# EAGLE board hacksaw_panelized_r0 (EAGLE 7.3.0)
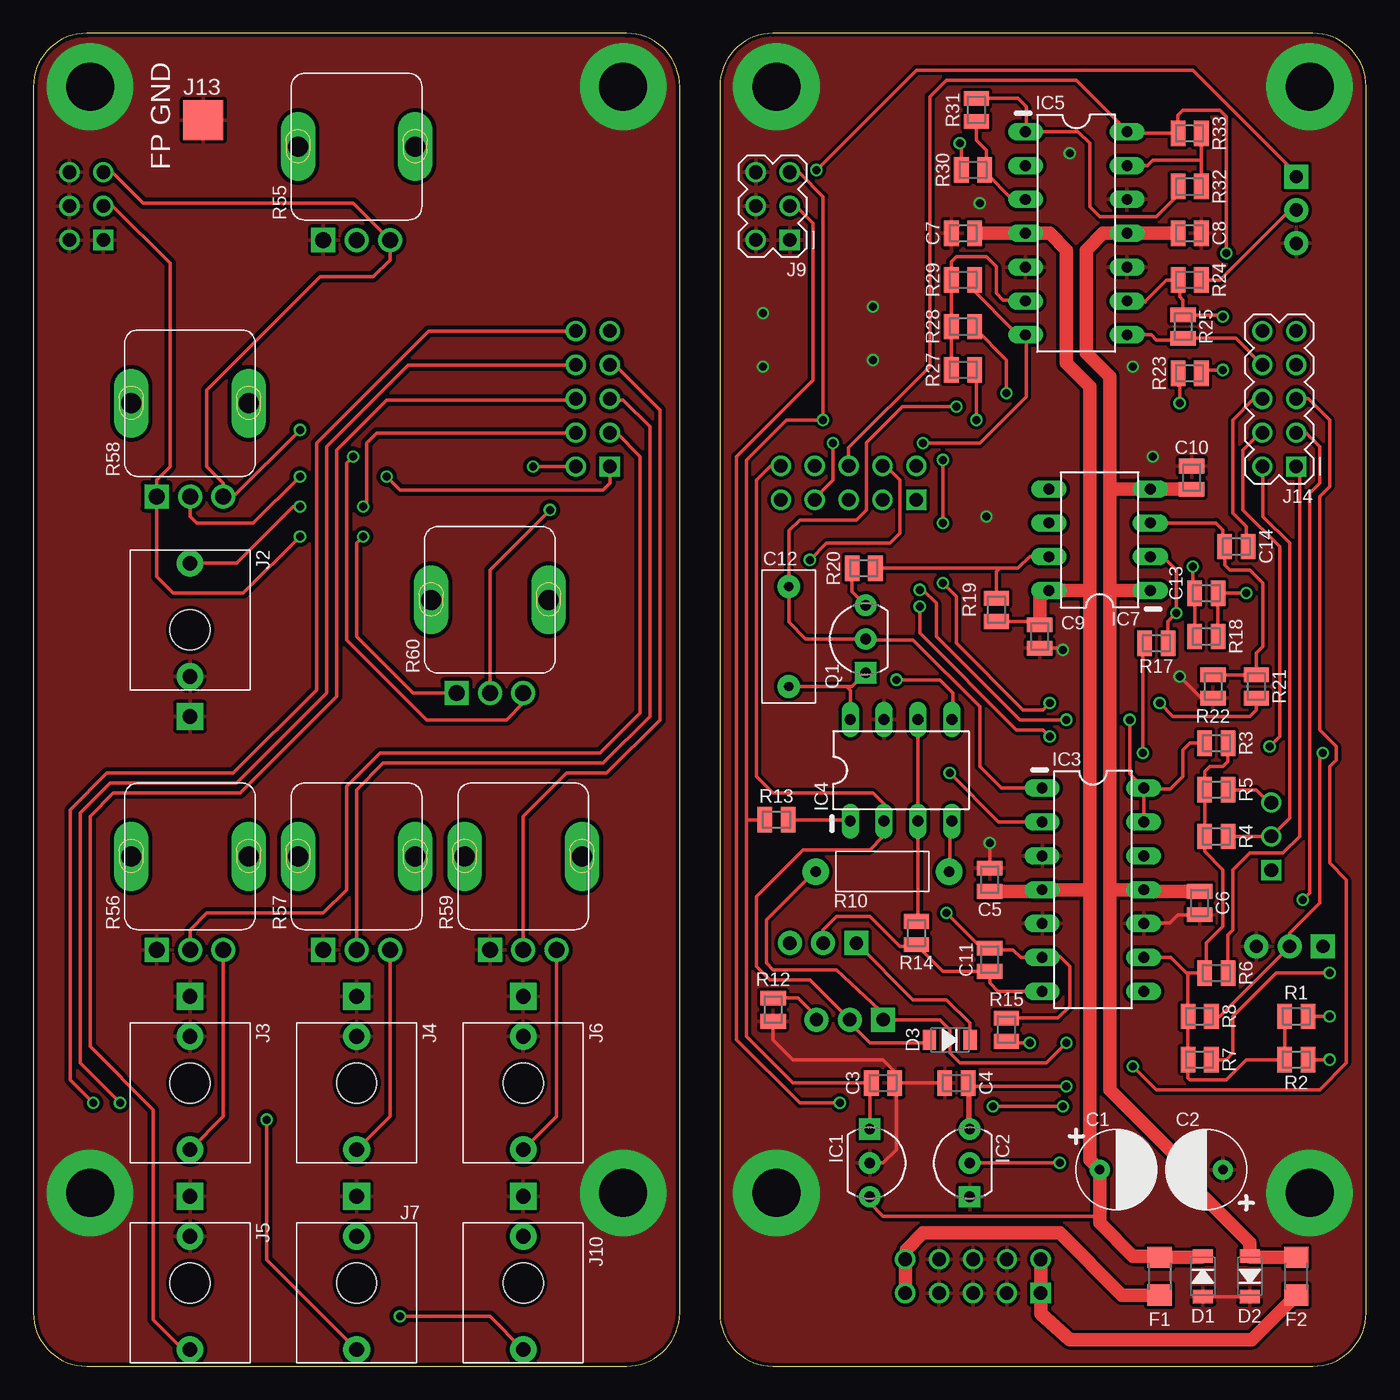
[diagram p0: board, top side]
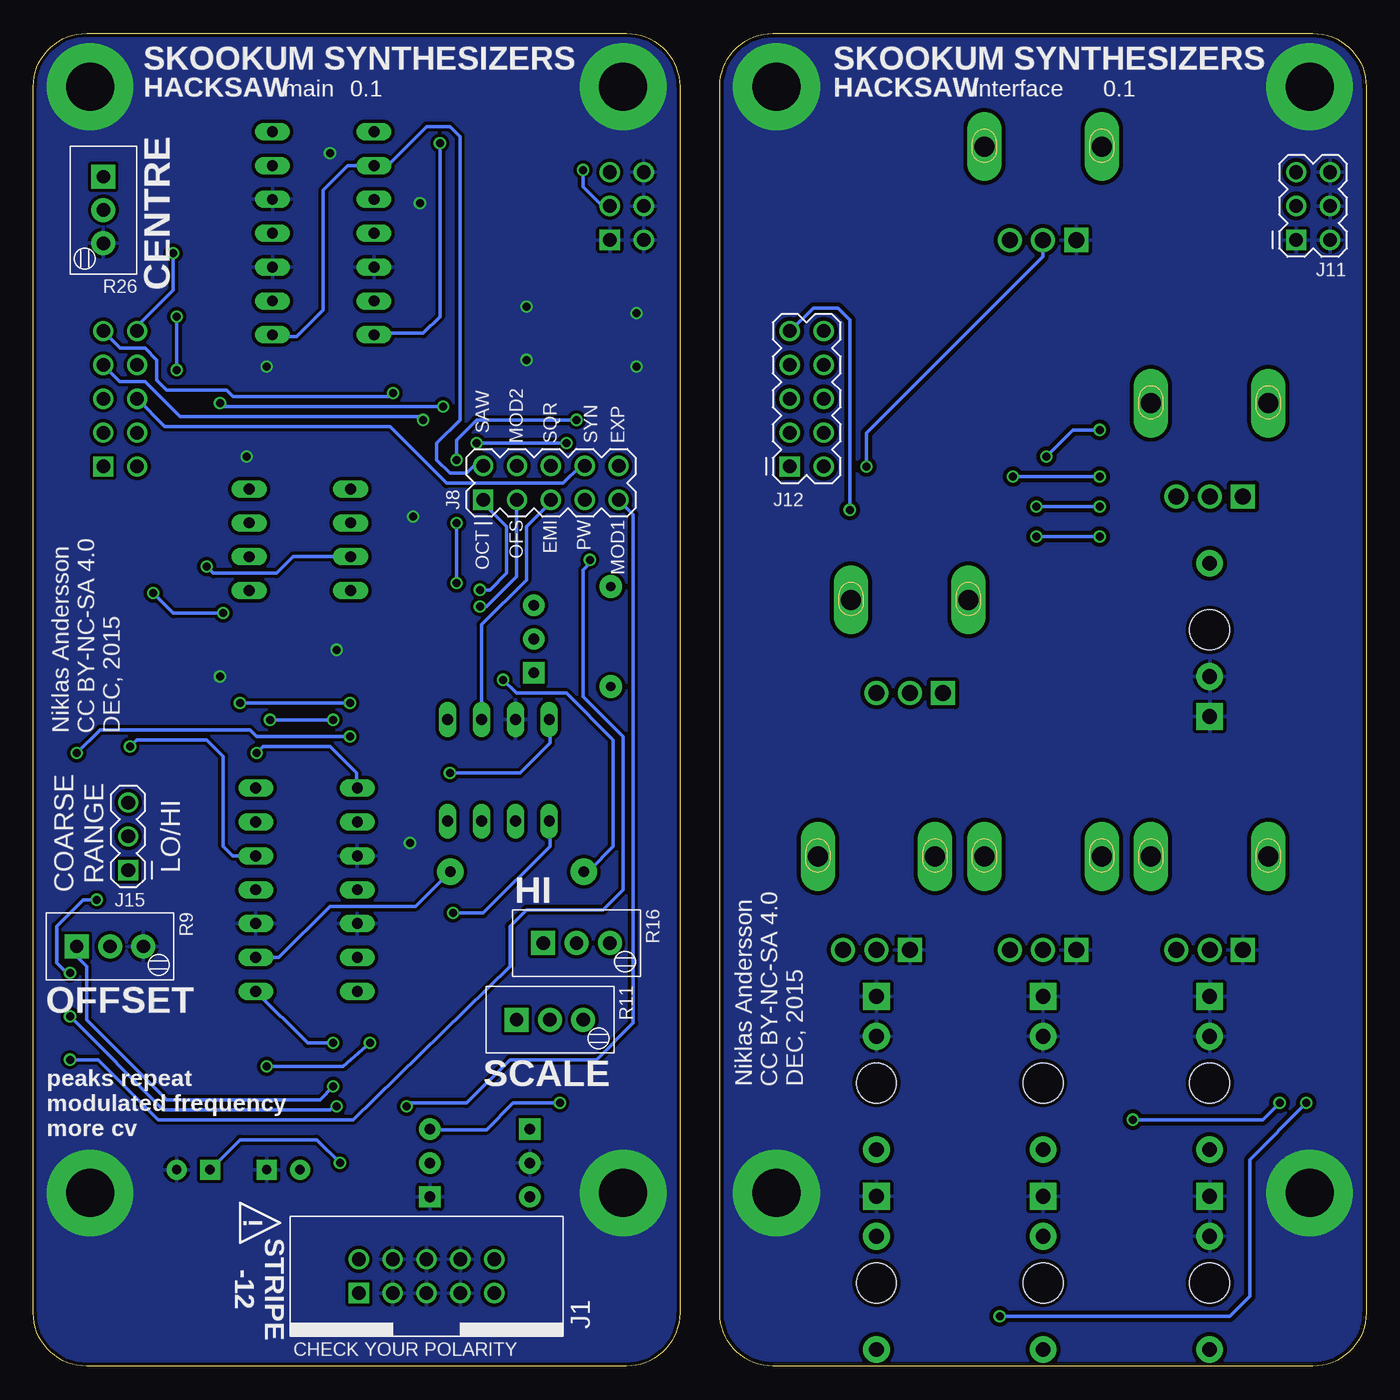
[diagram p1: board, bottom side, seen from below]

Size 100 x 100 mm. Coordinates in mm from the lower left corner, seen from the top.
Outline: 48.5,4 48.5,96 arc90 44.5,100 4,100 arc90 0,96 0,4 arc90 4,0 44.5,0 arc90 48.5,4
Outline: 55.5,0 96,0 arc90 100,4 100,96 arc90 96,100 55.5,100 arc90 51.5,96 51.5,4 arc90 55.5,0
Copper layers (1*16): Top 0.035mm / dielectric 1.5mm / Bottom 0.035mm
Design rules "dirt_cheap_dirty_boards.v1 *": minimum track width 5mil, minimum drill 12mil, track to track 6mil, track to pad 6mil, pad to pad 6mil, via to via 6mil, smd to smd 0mil, copper to edge 10mil, drill to drill 10mil, minimum pad ring 10mil, minimum via ring 6mil, stop-mask expansion 2mil, vias tented up to drill 25mil, thermal gap 10mil

## Footprints (pad centres in the part's own frame; a part is rotated, then mirrored left to right if it is on the bottom)
CAP_POL_2.5-6 = drill 0.7 pad 1.5: + -1.25,0 | drill 0.7 pad 1.5 square: - 1.25,0
0805 = smd 1.1 x 1.9: 1 -0.875,0; 2 0.875,0
PHE450 = drill 0.7 pad 1.7: 1 -3.75,0; 2 3.75,0
SOD123 = smd 1 x 1.5: A 1.525,0; K -1.525,0
1206 = smd 1.6 x 1.803: 1 -1.422,0; 2 1.422,0
TO-92_2 = drill 0.8 pad 1.6 square: 1 -2.54,0 | drill 0.8 pad 1.6: 2 0,0; 3 2.54,0
DIL14 = drill 0.813 long: 1 -7.62,-3.81; 2 -5.08,-3.81; 3 -2.54,-3.81; 4 0,-3.81; 5 2.54,-3.81; 6 5.08,-3.81; 7 7.62,-3.81; 8 7.62,3.81; 9 5.08,3.81; 10 2.54,3.81; 11 0,3.81; 12 -2.54,3.81; 13 -5.08,3.81; 14 -7.62,3.81
DIL8 = drill 0.813 long: 1 -3.81,-3.81; 2 -1.27,-3.81; 3 1.27,-3.81; 4 3.81,-3.81; 5 3.81,3.81; 6 1.27,3.81; 7 -1.27,3.81; 8 -3.81,3.81
HDR_POWER_10 = drill 1.016: +12V1 5.08,1.27; +12V2 5.08,-1.27; -12V1 -5.08,1.27; GND1 2.54,1.27; GND2 2.54,-1.27; GND3 0,1.27; GND4 0,-1.27; GND5 -2.54,1.27; GND6 -2.54,-1.27 | drill 1.016 square: -12V2 -5.08,-1.27
WQP_PJ301M-12 = drill 1.1 pad 2 square: S 0,-6.5 | drill 1.1 pad 2: SW 0,-3.5; T 0,5 | hole 3: 0,0
HDR_M_5X2 = drill 1.016 square: 1 0,0 | drill 1.016: 2 0,2.54; 3 2.54,0; 4 2.54,2.54; 5 5.08,0; 6 5.08,2.54; 7 7.62,0; 8 7.62,2.54; 9 10.16,0; 10 10.16,2.54
HDR_M_3X2 = drill 1.016 square: 1 0,0 | drill 1.016: 2 0,2.54; 3 2.54,0; 4 2.54,2.54; 5 5.08,0; 6 5.08,2.54
HDR_M_3X2_REAR = drill 1.016 square: 1 0,0 | drill 1.016: 2 0,2.54; 3 2.54,0; 4 2.54,2.54; 5 5.08,0; 6 5.08,2.54
HDR_M_5X2_REAR = drill 1.016 square: 1 0,0 | drill 1.016: 2 0,2.54; 3 2.54,0; 4 2.54,2.54; 5 5.08,0; 6 5.08,2.54; 7 7.62,0; 8 7.62,2.54; 9 10.16,0; 10 10.16,2.54
FP_GND = smd 3 x 3 bottom: P$1 0,0
HDR_M_3 = drill 1.016 square: 1 -2.54,0 | drill 1.016: 2 0,0; 3 2.54,0
M3 = drill 3.6 pad 6.5: M3 0,0
PV36W = drill 1 pad 1.8 square: 1 -2.5,0 | drill 1 pad 1.8: 2 0,0; 3 2.5,0
RESISTOR_TH_1/4W = drill 0.8 pad 2: 1 -5,0; 2 5,0
PTV09 = drill 1.2 pad 1.8 square: 1 -2.5,-7 | drill 1.2 pad 1.8: 2 0,-7; 3 2.5,-7 | drill 1.5 pad 2.6 long: NC1 -4.4,0; NC2 4.4,0

## Placement (x,y rotation side)
C1  33u  [CAP_POL_2.5-6]  81.25,14.75 0 top
C2  33u  [CAP_POL_2.5-6]  88,14.75 180 top
C3  104  [0805]  63.75,21.25 0 top
C4  104  [0805]  69.25,21.25 0 top
C5  104  [0805]  71.75,36.5 90 top
C6  104  [0805]  87.5,34.75 90 top
C7  104  [0805]  69.75,85 180 top
C8  104  [0805]  86.75,85 180 top
C9  104  [0805]  75.5,54.75 270 top
C10  104  [0805]  86.91,66.66 270 top
C11  101  [0805]  71.75,30.5 270 top
C12  222  [PHE450]  56.68,54.74 90 top
C13  15  [0805]  88,58 180 top
C14  471  [0805]  90.25,61.5 180 top
D1  5819  [SOD123]  87.75,6.75 270 top
D2  5819  [SOD123]  91.25,6.75 90 top
D3  4148  [SOD123]  68.75,24.5 180 top
F1  0ZCJ  [1206]  84.5,6.75 90 top
F2  0ZCJ  [1206]  94.75,6.75 270 top
IC1  78L05  [TO-92_2]  62.75,15.25 270 top
IC2  79L05  [TO-92_2]  70.25,15.25 90 top
IC3  TL074CN  [DIL14]  79.5,35.75 270 top
IC4  SSM2212  [DIL8]  65.1,44.71 0 top
IC5  TL074CN  [DIL14]  78.25,85 270 top
IC7  LM311P  [DIL8]  80,62 90 top
J1  [HDR_POWER_10]  70.5,6.75 0 bottom
J2  V/OCT  [WQP_PJ301M-12]  11.75,55.25 0 top
J3  EXP  [WQP_PJ301M-12]  11.75,21.25 180 top
J4  LIN  [WQP_PJ301M-12]  24.25,21.25 180 top
J5  SYNC  [WQP_PJ301M-12]  11.75,6.25 180 top
J6  PWM  [WQP_PJ301M-12]  36.75,21.25 180 top
J7  SAW  [WQP_PJ301M-12]  24.25,6.25 180 top
J8  CONN_HDR_5X21  [HDR_M_5X2]  66.25,65 0 bottom
J9  CONN_HDR_3X21  [HDR_M_3X2]  56.75,84.5 90 top
J10  PULSE  [WQP_PJ301M-12]  36.75,6.25 180 top
J11  CONN_HDR_3X22  [HDR_M_3X2_REAR]  5.25,84.5 90 top
J12  CONN_HDR_5X22  [HDR_M_5X2_REAR]  43.25,67.5 90 top
J13  TERMINAL_1SMT  [FP_GND]  12.75,93.5 0 bottom
J14  CONN_HDR_5X21  [HDR_M_5X2]  94.75,67.5 90 top
J15  TERMINAL_3_MHDR  [HDR_M_3]  92.88,39.75 90 bottom
M1  MOUNTING_HOLEM3  [M3]  44.25,96 0 top
M2  MOUNTING_HOLEM3  [M3]  55.75,13 0 top
M3  MOUNTING_HOLEM3  [M3]  95.75,13 0 top
M4  MOUNTING_HOLEM3  [M3]  55.75,96 0 top
M5  MOUNTING_HOLEM3  [M3]  95.75,96 0 top
M6  MOUNTING_HOLEM3  [M3]  4.25,13 0 top
M7  MOUNTING_HOLEM3  [M3]  44.25,13 0 top
M8  MOUNTING_HOLEM3  [M3]  4.25,96 0 top
Q1  2N5485  [TO-92_2]  62.45,54.56 90 top
R1  100K  [0805]  94.75,26.25 180 top
R2  100K  [0805]  94.75,23 180 top
R3  100K  [0805]  88.75,46.75 180 top
R4  100K  [0805]  88.75,39.75 180 top
R5  100K  [0805]  88.75,43.25 180 top
R6  1M2  [0805]  88.75,29.5 180 top
R7  100K  [0805]  87.5,23 180 top
R8  47K  [0805]  87.5,26.25 180 top
R9  10K  [PV36W]  94.25,31.5 0 bottom
R10  2K  [RESISTOR_TH_1/4W]  63.71,37.11 180 top
R11  100R  [PV36W]  61.25,26 0 bottom
R12  390R  [0805]  55.5,26.75 270 top
R13  1M  [0805]  55.75,41 180 top
R14  2K  [0805]  66.25,32.5 90 top
R15  100K  [0805]  73,25.25 270 top
R16  1MEG  [PV36W]  59.25,31.75 0 bottom
R17  10K  [0805]  84.25,54.25 0 top
R18  100K  [0805]  88,54.75 180 top
R19  10K  [0805]  72.25,56.75 270 top
R20  1K  [0805]  62.3,59.87 0 top
R21  47K  [0805]  91.75,51 270 top
R22  91K  [0805]  88.5,51 90 top
R23  120K  [0805]  86.75,74.5 0 top
R24  120K  [0805]  86.75,81.5 180 top
R25  300K  [0805]  86.25,78 270 top
R26  10K  [PV36W]  94.75,86.75 270 bottom
R27  110K  [0805]  69.75,74.75 180 top
R28  110K  [0805]  69.75,78 180 top
R29  100K  [0805]  69.75,81.5 0 top
R30  10K  [0805]  70.5,89.75 0 top
R31  1M  [0805]  70.75,94.25 90 top
R32  100K  [0805]  86.75,88.5 0 top
R33  47K  [0805]  86.75,92.5 180 top
R55  COARSE  [PTV09]  24.25,91.5 0 top
R56  EXP  [PTV09]  11.75,38.25 0 top
R57  LIN  [PTV09]  24.25,38.25 0 top
R58  FINE  [PTV09]  11.75,72.25 0 top
R59  PWM  [PTV09]  36.75,38.25 0 top
R60  PWM  [PTV09]  34.25,57.5 0 top

## Library data of the parts
C1-C14 D1-D3 F1 F2 IC1-IC5 IC7 J1-J15 M1-M8 Q1 R1-R33 R55-R60 = 000

## Nets
1_COARSE: J12.2 R55.2
1_EXP: J12.3 R56.2
1_EXP_IN: J3.T R56.3
1_FINE: J12.1 R58.2
1_LIN: J12.5 R57.2
1_LIN_IN: J4.T R57.3
1_PULSE_OUT: J10.T J12.10
1_PWM: J12.7 R59.2
1_PWM_IN: J6.T R59.3
1_PWM_INIT: J12.9 R60.2
1_SAW_OUT: J7.T J12.8
1_SYNC_IN: J5.T J12.6
1_V/OCT: J2.T J12.4
2_COARSE: J14.2 J15.2 R4.1
2_EXP: J14.3 R7.1
2_FINE: J14.1 R6.1
2_LIN: J14.5 R15.2
2_PULSE_OUT: IC5.14 J8.6 J14.10 R33.2
2_PWM: J14.7 R27.1
2_PWM_INIT: J14.9 R28.1
2_SAW_OUT: IC5.2 IC5.8 J8.2 J14.8 R25.2
2_SYNC_IN: C14.1 J8.8 J14.6
2_SYNC_PULSE: C13.2 IC7.7 R18.2 R19.1 R20.2
2_V/OCT: IC3.12 J14.4
+5V: J11.5 R55.3 R58.3 R60.3
+5V1: C3.1 IC1.1 J9.5 R13.2 R21.2
+12V: C1.+ C5.1 C7.1 C9.1 D1.K F1.2 IC1.3 IC3.4 IC5.4 IC7.8 R19.2
-5V: J11.3 R58.1 R60.1
-5V1: C4.2 IC2.3 J9.3 R9.1 R26.1
-12V: C2.- C6.2 C8.2 C10.2 D2.A F2.1 IC2.2 IC3.11 IC5.11 IC7.1 IC7.4
C1: C11.1 IC3.6 IC4.1 R13.1 R15.1
C2: C12.1 IC3.2 IC4.8 Q1.1
CV: IC3.8 R10.2 R11.1
EMIT: IC4.3 IC4.6 J8.5 R14.2
EXPO: D3.A IC4.2 J8.10 R11.2
GND: J2.S J2.SW J3.S J3.SW J4.S J4.SW J5.S J5.SW J6.S J6.SW J7.S J10.S J11.1 J11.2 J11.4 J11.6 J13.P$1 M1.M3 M6.M3 M7.M3 M8.M3 R55.1 R56.1 R57.1 R59.1
GND1: C1.- C2.+ C3.2 C4.1 C5.2 C6.1 C7.2 C8.1 C9.2 C10.1 D1.A D2.K IC1.2 IC2.1 IC3.3 IC3.5 IC3.10 IC4.7 IC5.5 IC5.10 IC5.12 J1.GND1 J1.GND2 J1.GND3 J1.GND4 J1.GND5 J1.GND6 J9.1 J9.2 J9.4 J9.6 M2.M3 M3.M3 M4.M3 M5.M3 R9.3 R12.2 R22.1 R26.3
MOD1: J8.9 R1.1
MOD2: J8.4 R2.1
N$3: C13.1 IC7.2 R17.2 R18.1
N$4: F1.1 J1.+12V1 J1.+12V2
N$5: R11.3 R12.1
N$6: IC5.1 R31.2 R32.1
N$8: D3.K R16.1
N$9: IC5.6 R27.2 R28.2 R29.1
N$10: Q1.3 R20.1
N$11: IC5.3 R30.2 R31.1
N$16: J15.3 R5.1
N$17: IC5.13 R32.2 R33.1
N$19: IC3.9 R1.2 R2.2 R3.1 R4.2 R5.2 R6.2 R7.2 R8.2 R10.1
N$30: IC5.9 R23.2 R24.2 R25.1
N$33: R24.1 R26.2
N$41: F2.2 J1.-12V1 J1.-12V2
N$54: C11.2 IC3.7 R14.1 R16.2
OFFSET: J8.3 R8.1 R9.2
PW: IC5.7 J8.7 R29.2 R30.1
RAW: C12.2 IC3.1 Q1.2 R17.1 R23.1
RESET: C14.2 IC7.3 R21.1 R22.2
V/OCT: IC3.13 IC3.14 J8.1 R3.2

## Tracks (layer width: path | path; a pad name or v marks a point on that pad's centre or on a via)
1_COARSE  (via drill 0.6)
  Top 0.25: v37.5,67.5 J12.2
  Bottom 0.25: v37.5,67.5 37.5,70 24.25,83.25 R55.2
1_EXP
  Top 0.25: R56.2 11.75,32.75 13,34 21.75,34 23.5,35.75 23.5,43.5 26,46 42.5,46 45.5,49 45.5,68.25 43.79,70 43.29,70 J12.3
1_EXP_IN
  Top 0.25: R56.3 14.25,18.75 J3.T
1_FINE  (via drill 0.6)
  Top 0.25: J12.1 43.25,66.25 42.75,65.75 27.5,65.75 v26.5,66.75 | R58.2 11.75,63.75 12.25,63.25 16.5,63.25 v20,66.75
  Bottom 0.25: v26.5,66.75 v20,66.75
1_LIN
  Top 0.25: R57.2 24.25,43.25 26.25,45.25 42.75,45.25 46.25,48.75 46.25,70.5 44.25,72.5 43.33,72.5 J12.5
1_LIN_IN
  Top 0.25: R57.3 26.75,18.75 J4.T
1_PULSE_OUT  (via drill 0.6)
  Top 0.25: J12.10 29.66,77.66 21.25,69.25 21.25,50.75 15,44.5 5.5,44.5 2.75,41.75 2.75,21.5 v4.5,19.75 | v27.5,3.75 34.25,3.75 J10.T
  Bottom 0.25: v27.5,3.75 10.25,3.75 8.75,5.25 8.75,15.5 v4.5,19.75
1_PWM
  Top 0.25: R59.2 36.75,41.25 40,44.5 43,44.5 47,48.5 47,71.75 43.63,75.12 J12.7
1_PWM_IN
  Top 0.25: R59.3 39.25,18.75 J6.T
1_PWM_INIT  (via drill 0.6)
  Top 0.25: R60.2 34.25,59.75 v38.75,64.25
  Bottom 0.25: v38.75,64.25 38.75,78.5 39.62,79.38 41.47,79.38 J12.9
1_SAW_OUT  (via drill 0.6)
  Top 0.25: J12.8 28.12,75.12 22,69 22,50.5 15.25,43.75 5.75,43.75 3.5,41.5 3.5,22.75 v6.5,19.75 | v17.5,18.5 17.5,8 J7.T
  Bottom 0.25: v6.5,19.75 7.75,18.5 v17.5,18.5
1_SYNC_IN
  Top 0.25: J12.6 40.38,72.5 26.5,72.5 22.75,68.75 22.75,50.25 15.5,43 6,43 4.25,41.25 4.25,24 9,19.25 9,3.5 11.25,1.25 J5.T
1_V/OCT  (via drill 0.6)
  Top 0.25: J12.4 40.42,70 25.75,70 25,69.25 25,64.75 v24.75,64.5 | J2.T 15.25,60.25 19.5,64.5 v20,64.5
  Bottom 0.25: v24.75,64.5 v20,64.5
2_COARSE
  Top 0.25: R4.1 J15.2 94.25,41.12 94.25,61.75 92.25,63.75 92.25,67.46 J14.2
2_EXP  (via drill 0.6)
  Top 0.25: J14.3 95.46,70.04 96.5,69 96.5,66.25 95.75,65.5 95.75,35.5 v95.25,35 | R7.1 89.5,23 90,23.5 90,26.25 93.25,29.5 v97.25,29.5
  Bottom 0.25: v97.25,29.5 97.5,29.5 98.25,30.25 98.25,33 96.25,35 v95.25,35
2_FINE
  Top 0.25: R6.1 89.62,32.38 90,32.75 90,37.25 91.25,38.5 93.75,38.5 95,39.75 95,67.25 J14.1
2_LIN  (via drill 0.6)
  Top 0.25: v74.75,24.25 73.12,24.25 R15.2 | J14.5 95.67,72.58 97.25,71 97.25,66 96.5,65.25 96.5,47.75 97.75,46.5 97.75,45.5 97.25,45 97.25,37.75 98.5,36.5 98.5,22.75 96.5,20.75 84.25,20.75 v82.5,22.5
  Bottom 0.25: v82.5,22.5 76.75,22.5 v74.75,24.25
2_PULSE_OUT  (via drill 0.6)
  Top 0.25: J8.6 61.17,68.92 67.25,75 67.25,95.25 68.5,96.5 78.25,96.5 82.06,92.69 IC5.14 82.18,92.5 R33.2 85.88,93.88 86.25,94.25 89,94.25 89.5,93.75 v89.5,83.5
  Bottom 0.25: 81.94,92.5 IC5.14 | v89.5,83.5 89.5,80.75 92.25,78 92.25,77.7 J14.10
2_PWM  (via drill 0.6)
  Top 0.25: R27.1 70.75,74.75 v70.75,71
  Bottom 0.25: v70.75,71 71,71.25 89,71.25 91.62,73.88 93.5,73.88 J14.7
2_PWM_INIT  (via drill 0.6)
  Top 0.25: R28.1 70.62,77.88 73,75.5 v73,73
  Bottom 0.25: J14.9 93.47,76.38 91.62,76.38 90.75,75.5 90.75,74 90,73.25 85.5,73.25 85,72.75 73.25,72.75 v73,73
2_SAW_OUT
  Top 0.25: IC5.8 83.87,77.38 84.25,77 86.12,77 R25.2 90.2,77.12 J14.8
  Bottom 0.25: 66.21,67.54 J8.2 66.96,67.54 67.5,67 68.75,67 69.75,68 69.75,69.25 68,71 68,92.25 68.75,93 70.5,93 73.5,90 74.36,90 IC5.2 76.42,90.08 78.25,88.25 78.25,79.25 80.25,77.25 81.93,77.25 IC5.8
2_SYNC_IN
  Top 0.25: J14.6 91.58,72.58 90,71 90,64 91,63 91,61.62 C14.1
  Bottom 0.25: J8.8 58.96,67.54 60.25,66.25 69,66.25 73.25,70.5 90.13,70.5 J14.6
2_SYNC_PULSE  (via drill 0.6)
  Top 0.25: R20.2 72.5,59.87 | 72.5,59.87 73.87,59.87 74.75,60.75 76.17,60.75 IC7.7 | R18.2 C13.2 87,58.12 v87,60 | R19.1 72.25,59.62 72.5,59.87
  Bottom 0.25: IC7.7 80.52,60.73 81.75,59.5 86.5,59.5 v87,60
2_V/OCT  (via drill 0.6)
  Top 0.25: v92.75,46.5 93.5,47.25 93.5,61.5 90.75,64.25 90.75,68.75 92.04,70.04 J14.4
  Bottom 0.25: IC3.12 85.04,38.29 85.75,39 85.75,45.75 87,47 92.25,47 v92.75,46.5
+5V  (via drill 0.6)
  Top 0.25: J11.5 5.92,89.58 8.25,87.25 24,87.25 R55.3 26.75,83 25.5,81.75 21.5,81.75 13,73.25 13,67.5 14.25,66.25 R58.3 15,65.25 v20,70.25 | R60.3 36.75,49.75 35.5,48.5 29.5,48.5 23.5,54.5 23.5,67.75 v24,68.25
  Bottom 0.25: v20,70.25 22,70.25 v24,68.25
+5V1  (via drill 0.6)
  Top 0.25: IC1.1 62.75,21.12 C3.1 57,21.25 53.5,24.75 53.5,41 | R13.2 53.5,41 | 53.5,41 53.5,68 56.5,71 v59.25,71 59.25,87.75 57.5,89.5 56.83,89.5 J9.5 | R21.2 91.75,49.25 91.25,48.75 85.5,48.75 v84.5,49.75 | v68.25,58.75 69.25,57.75 69.25,54.25 74.25,49.25 75.75,49.25 v76.25,49.75 | v68.25,63.25 v68.25,68
  Bottom 0.25: v84.5,49.75 v76.25,49.75 | v59.25,71 66.75,71 68.25,69.5 v68.25,68 | v68.25,58.75 v68.25,63.25
+12V
  Top 0.25: IC1.3 62.75,12.25 63.75,11.25 79.5,11.25 80,10.75 | 75.69,35.62 IC3.4 | 78.81,58.19 79.25,58.25 | 75.43,55.7 C9.1 75.25,55.88 R19.2 | 79,65.81 79.25,65.5 | 76,58 IC7.8 | 84.42,8.25 F1.2 | 87.65,8.17 D1.K
  Top 1: 79.25,35.75 79.25,15.5 C1.+ 80,10.75 82.5,8.25 84.42,8.25 | C5.1 75.69,35.62 | IC3.4 79.25,35.75 | 79.25,35.75 79.25,58.25 79.25,65.5 79.25,73.5 77.5,75.25 77.5,83.75 76.25,85 IC5.4 C7.1 | C9.1 75.5,58 76,58 | IC7.8 78.81,58.19 | F1.2 87.65,8.17
-5V  (via drill 0.6)
  Top 0.25: J11.3 5.96,87.04 10.25,82.75 10.25,67.5 9.25,66.5 R58.1 9.25,59.25 10.5,58 15.75,58 v20,62.25 | R60.1 28.5,50.5 24.25,54.75 24.25,61.75 v24.75,62.25
  Bottom 0.25: v20,62.25 v24.75,62.25
-5V1  (via drill 0.6)
  Top 0.25: IC2.3 70.25,21.12 C4.2 | v77.5,21 70.38,21 C4.2 | C4.2 70.12,17.88 v70.25,17.75 | R26.1 94.5,89.5 94.5,89.75 87,97.25 66.25,97.25 v58.75,89.75 | v60.5,19.75 57.5,19.75 52.75,24.5 52.75,68.25 58.5,74 58.5,85.75 57.25,87 56.79,87 J9.3
  Bottom 0.25: v77.5,21 78.5,20 90,20 96,26 96,30 96.75,30.75 R9.1 | v70.25,17.75 66,17.75 64,19.75 v60.5,19.75 | v58.75,89.75 58.75,88.5 57.25,87 56.79,87 J9.3
-12V  (via drill 0.6)
  Top 0.25: IC2.2 v77,15.25 | 83.31,35.62 IC3.11 | 86.89,65.81 C10.2 86.91,65.81 | 81.06,65.81 80.75,65.75 | 81.19,58.19 80.75,58 | 91.35,8.17 D2.A
  Top 1: IC3.11 80.75,35.75 | 80.75,35.75 80.75,20.75 C2.- 86.75,13.75 91.25,9.25 D2.A | C6.2 83.31,35.62 | 80.75,35.75 80.75,58 80.75,65.75 80.75,74.25 79,76 79,83.75 80.25,85 IC5.11 C8.2 | 81.06,65.81 IC7.4 86.91,65.81 | IC7.1 81.19,58.19 | F2.1 91.35,8.17
  Bottom 0.25: C2.- 84.5,17 78.75,17 v77,15.25
C1  (via drill 0.6)
  Top 0.25: 61.25,40.94 IC4.1 | 61.25,40.86 IC4.1 | R15.1 76.88,26.12 77.75,27 77.75,30 77,30.75 75.77,30.75 IC3.6 74.08,30.67 73.5,31.25 71.88,31.25 C11.1 71.12,31.38 v68.5,34 | R13.1 61.19,41 IC4.1
  Bottom 0.25: v68.5,34 66.25,34 61.25,39 61.25,40.86 IC4.1
C2  (via drill 0.6)
  Top 0.25: C12.1 61,50.99 | 61,50.99 61.42,50.99 Q1.1 | IC4.8 61.29,50.7 61,50.99 | IC3.2 72.42,40.83 v68.75,44.5
  Bottom 0.25: v68.75,44.5 63.5,44.5 61.25,46.75 61.25,48.48 IC4.8
CV  (via drill 0.6)
  Top 0.25: R10.2 58.75,37.07 58.75,37.25 55,33.5 55,30.25 55.5,29.75 60.25,29.75 64,26.25 R11.1 68,26 68.75,25.25 68.75,23.5 69.5,22.75 76,22.75 v77.5,24.25
  Bottom 0.25: v77.5,24.25 79.43,24.25 IC3.8
EMIT
  Top 0.25: R14.2 66.37,33.38 IC4.3 IC4.6
  Bottom 0.25: J8.5 61.25,64.92 61.25,64.75 63,63 63,59 66.37,55.63 IC4.6
EXPO
  Top 0.25: D3.A 66.72,24.25 62.75,24.25 61.25,25.75 R11.2 58.25,29 55.25,29 54.25,30 54.25,35.25 57.75,38.75 62.75,38.75 63.75,39.75 63.75,40.82 IC4.2 63.83,42.17 63,43 55.5,43 54.25,44.25 54.25,66.5 55.25,67.5 56.05,67.5 J8.10
GND
  pour Bottom (isolate 0.3): 0,100 48.5,100 48.5,0 0,0
  pour Top (isolate 0.3): 0,100 48.5,100 48.5,0 0,0
GND1  (via drill 0.6)
  Top 0.25: C3.2 C4.1 | IC1.2 63.75,15.25 64.75,16.25 64.75,21.12 C3.2 | D2.K D1.A | C5.2 v71.75,39.25 | C6.1 85.88,33.88 85.25,33.25 83.35,33.25 IC3.10 | R12.2 55.5,24.5 57,23 63.75,23 64.5,22.25 64.5,21.38 C3.2 | C9.2 77.12,53.88 v77.25,53.75 | R22.1 87.62,50.12 v86,51.75
  other vias: 71.5,63.75 84,68.25 82.5,75 77.75,91 71,87.25 63,79.5 63,75.5 54.75,75 54.75,79
  pour Bottom (isolate 0.25): 51.5,100 100,100 100,0 51.5,0
  pour Top (isolate 0.25): 51.5,100 100,100 100,0 51.5,0
MOD1  (via drill 0.6)
  Top 0.25: R1.1 v97.25,26.25 | v72,19.5 v77.25,19.5
  Bottom 0.25: v72,19.5 71.75,19.75 67.5,19.75 64.25,23 57.75,23 55,25.75 55,63.91 J8.9 | v97.25,26.25 90.25,19.25 77.75,19.25 77.5,19.5 v77.25,19.5
MOD2  (via drill 0.6)
  Top 0.25: R2.1 v97.25,23 | J8.4 63.96,67.54 65,66.5 65,62.5 64.25,61.75 59.5,61.75 v58.25,60.5
  Bottom 0.25: v58.25,60.5 58.25,60.25 58.75,59.75 58.75,50.25 55.75,47.25 55.75,35.75 57.25,34.25 63,34.25 64.25,33 64.25,30 76,18.5 90.62,18.5 95.12,23 v97.25,23
N$2
  Top 0.25: 68.75,36.75 68.75,40.25 69,40.75
N$3  (via drill 0.6)
  Top 0.25: R17.2 85.12,55.88 v85.75,56.5 85.75,59.75 84.75,60.75 83.83,60.75 IC7.2 | R18.1 C13.1 v91,58
  Bottom 0.25: v85.75,56.5 89.5,56.5 v91,58 | 83.83,60.75 IC7.2
N$4
  Top 0.25: 65.5,8.1 J1.+12V1
  Top 1: J1.+12V1 J1.+12V2 | F1.1 81.67,5.33 77,10 66.75,10 65.5,8.75 65.5,8.1
N$5
  Top 0.25: R12.1 57.38,27.62 58.75,26.25 R11.3
N$6
  Top 0.25: 85.75,88.38 R32.1 86,88.38 86,88 84.25,86.25 80,86.25 79.25,87 79.25,91.75 78.38,92.62 IC5.1 74.5,92.68 74.5,94.5 73.88,95.12 R31.2 70.62,95.25
N$8
  Top 0.25: R16.1 66,27.5 68.5,27.5 70.25,25.75 70.25,24.52 D3.K
N$9
  Top 0.25: R27.2 R28.2 R29.1 68.88,82.88 69.25,83.25 71.5,83.25 72.25,82.5 72.25,80.5 72.75,80 74.36,80 IC5.6
N$10
  Top 0.25: R20.1 61.42,58.12 Q1.3
N$11
  Top 0.25: R31.1 70.75,92 71.5,91.25 71.5,89.88 R30.2 71.38,89.62 73.5,87.5 74.4,87.5 IC5.3
N$16
  Top 0.25: R5.1 91.75,43.25 92.75,42.25 92.84,42.25 J15.3
N$17
  Top 0.25: R33.1 87.62,90.5 | 87.62,90.5 R32.2 | IC5.13 83.58,90.08 84,90.5 87.62,90.5
N$19
  Top 0.25: IC3.9 85.33,30.67 86.5,29.5 | 86.5,29.5 R6.2 88,29.62 88,31.75 89.25,33 89.25,37.25 87.88,38.62 R4.2 R5.2 87.88,44.62 88.25,45 89.25,45 89.62,45.38 R3.1 | R1.2 R2.2 | 93.75,22.88 R2.2 | 86.5,29.5 86.62,29.38 R8.2 R7.2 86.62,21.62 86.75,21.5 89.5,21.5 91,23 R2.2
  Bottom 0.25: IC3.9 81.58,30.67 77.75,34.5 71.32,34.5 R10.1
N$30  (via drill 0.6)
  Top 0.25: IC5.9 83.42,79.92 | 83.42,79.92 85,81.5 R24.2 86,81.38 86,80.25 86.25,80 R25.1 89.12,78.88 v89.25,78.75 | 83.42,79.92 83.42,79.83 | v89.25,74.75 87.88,74.75 R23.2
  Bottom 0.25: v89.25,78.75 v89.25,74.75
N$33
  Top 0.25: R24.1 89,81.5 94.25,86.75 R26.2
N$41
  Top 1: J1.-12V1 J1.-12V2 75.58,3.92 77.75,2 91.42,2 F2.2
N$54
  Top 0.25: R16.2 59.25,32.75 60.25,33.75 62.75,33.75 65,31.5 66.12,31.5 R14.1 68.25,29.62 C11.2 71.75,28.75 72.37,28.13 IC3.7
OFFSET  (via drill 0.6)
  Top 0.25: v66.5,57 66.5,55 73.75,47.75 75.75,47.75 v76.25,47.25 | 94.25,31.75 R9.2 | v96.75,46 96.5,45.75 96.5,34.75 94.25,32.5 R9.2 | R8.1 89,26.25 R9.2
  Bottom 0.25: v96.75,46 95,47.75 83.75,47.75 83.25,47.25 v76.25,47.25 | J8.3 63.75,64.96 63.75,59.25 66,57 v66.5,57
PW  (via drill 0.6)
  Top 0.25: R29.2 70.62,80.62 73.5,77.75 74.07,77.75 IC5.7 74.5,77.32 74.5,72.75 71,69.25 v66.75,69.25 | 69.62,89.12 R30.1 69.62,91.62 v69.5,91.75 | J8.7 58.63,65.13 60,66.5 v60,69.25
  Bottom 0.25: v69.5,91.75 69.5,78.75 70.75,77.5 74.32,77.5 IC5.7 | v60,69.25 v66.75,69.25
RAW  (via drill 0.6)
  Top 0.25: IC3.1 72.63,43.37 71,45 71,49.5 66,54.5 62.51,54.5 Q1.2 57.94,54.56 56.68,55.82 C12.2 56.68,62.68 57.5,63.5 61.75,63.5 62.5,64.25 62.5,69.3 65.19,72 66.5,72 68,72 v69.25,72 | v83.25,46 83.25,54.12 R17.1 | R23.1 85.88,74 | 85.88,74 85.88,73.62 | v86,72.25 86,73.88 85.88,74
  Bottom 0.25: IC3.1 75.75,43.43 75.75,44.5 77.75,46.5 82.75,46.5 v83.25,46 | v69.25,72 85.75,72 v86,72.25
RESET
  Top 0.25: R22.2 R21.1 91.75,53.5 92.25,54 92.25,58.75 91.25,59.75 89.75,59.75 89.38,60.12 C14.2 89.25,61.62 89.25,62.75 88.73,63.27 IC7.3
S$1  (via drill 0.6)
  Top 0.25: v64.75,51.5 68,51.5 69,50.5 69,48.75 68.75,48.5
  Bottom 0.25: 58.5,37.25 58.25,37.25 56.5,39 56.5,47 60,50.5 63.75,50.5 v64.75,51.5
V/OCT  (via drill 0.6)
  Top 0.25: IC3.14 IC3.13 | IC3.14 82.81,43.31 85.31,43.31 86.25,44.25 86.25,46.25 86.75,46.75 R3.2 | v77.5,48.5 74,48.5 67.75,54.75 67.75,57.25 66.75,58.25 v66.5,58.25 | v82.25,48.5 82.25,44.43 IC3.14
  Bottom 0.25: v77.5,48.5 v82.25,48.5 | J8.1 66.25,64.75 64.5,63 64.5,59.5 65.75,58.25 v66.5,58.25

## Text on the board
tPlace: FP GND
bPlace: SKOOKUM SYNTHESIZERS | SKOOKUM SYNTHESIZERS | 0.1 | interface | HACKSAW | 0.1 | main | HACKSAW | CENTRE | SAW | EXP | SYN | SQR | MOD2 | MOD1 | PW | EMI | OFS | OCT | LO/HI | COARSE / RANGE | HI | OFFSET | SCALE | peaks repeat / modulated frequency / more cv | CHECK YOUR POLARITY
bNames: Niklas Andersson / CC BY-NC-SA 4.0 / DEC, 2015 | Niklas Andersson / CC BY-NC-SA 4.0 / DEC, 2015